# Altium PCB 05-01891R2.1T_接收+NRF2401.PcbDoc
Units mm, origin at the board's own origin, x right, y up, seen from the top; angles counter-clockwise.
Board outline 23.4 x 50 mm, 2 copper layers (Top Layer, Bottom Layer); 20 components, 25 nets, 86 pads, 32 vias.
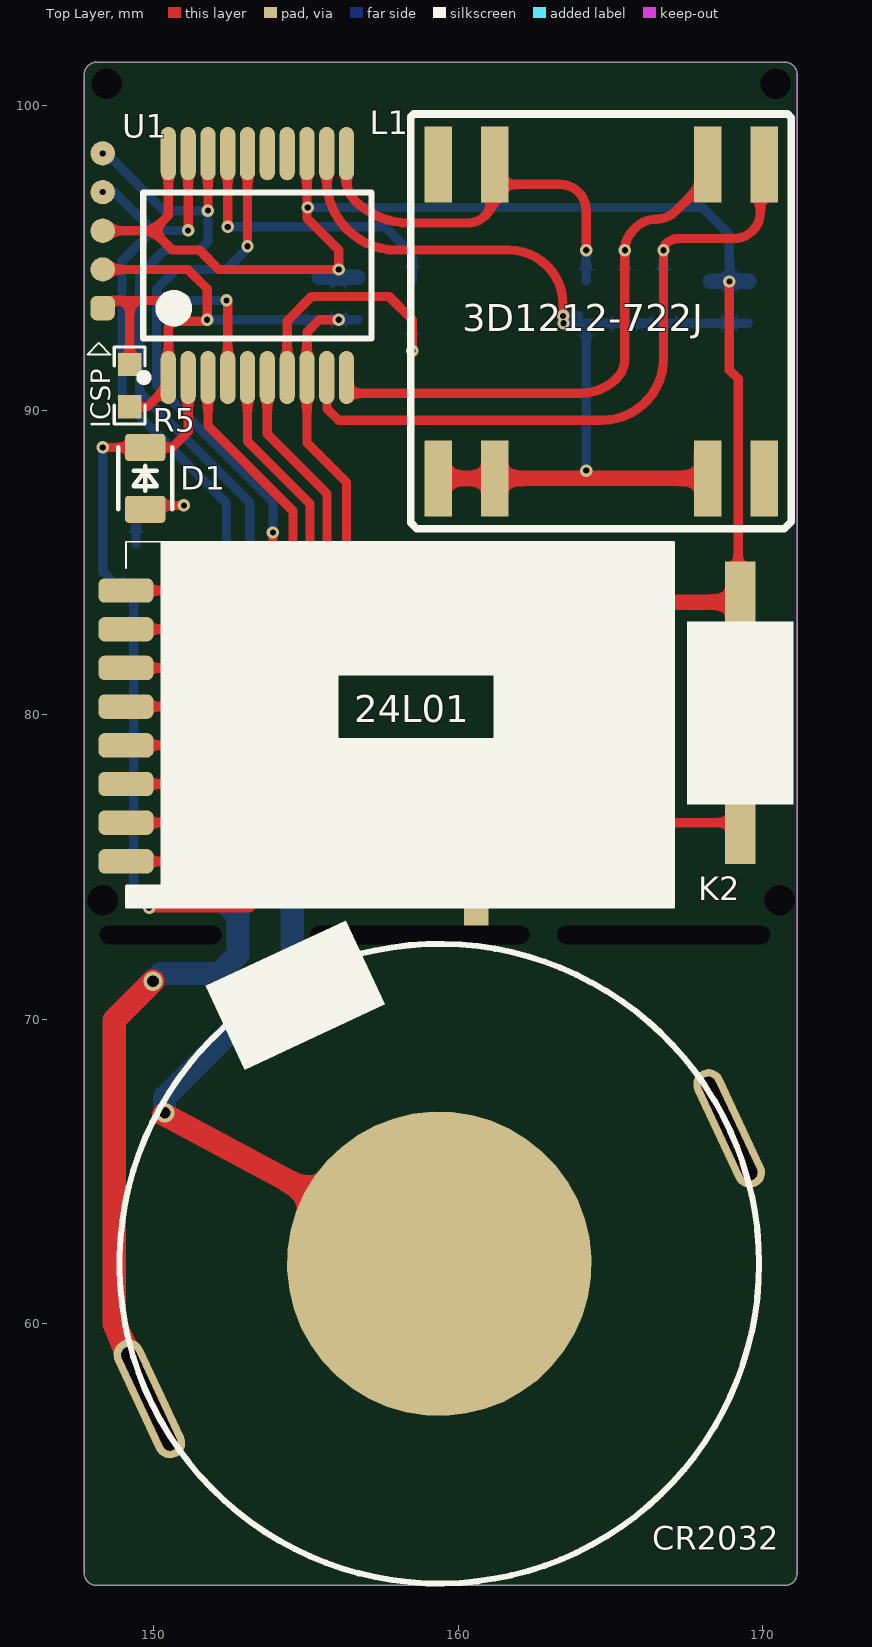
[diagram p0: Top Layer view]
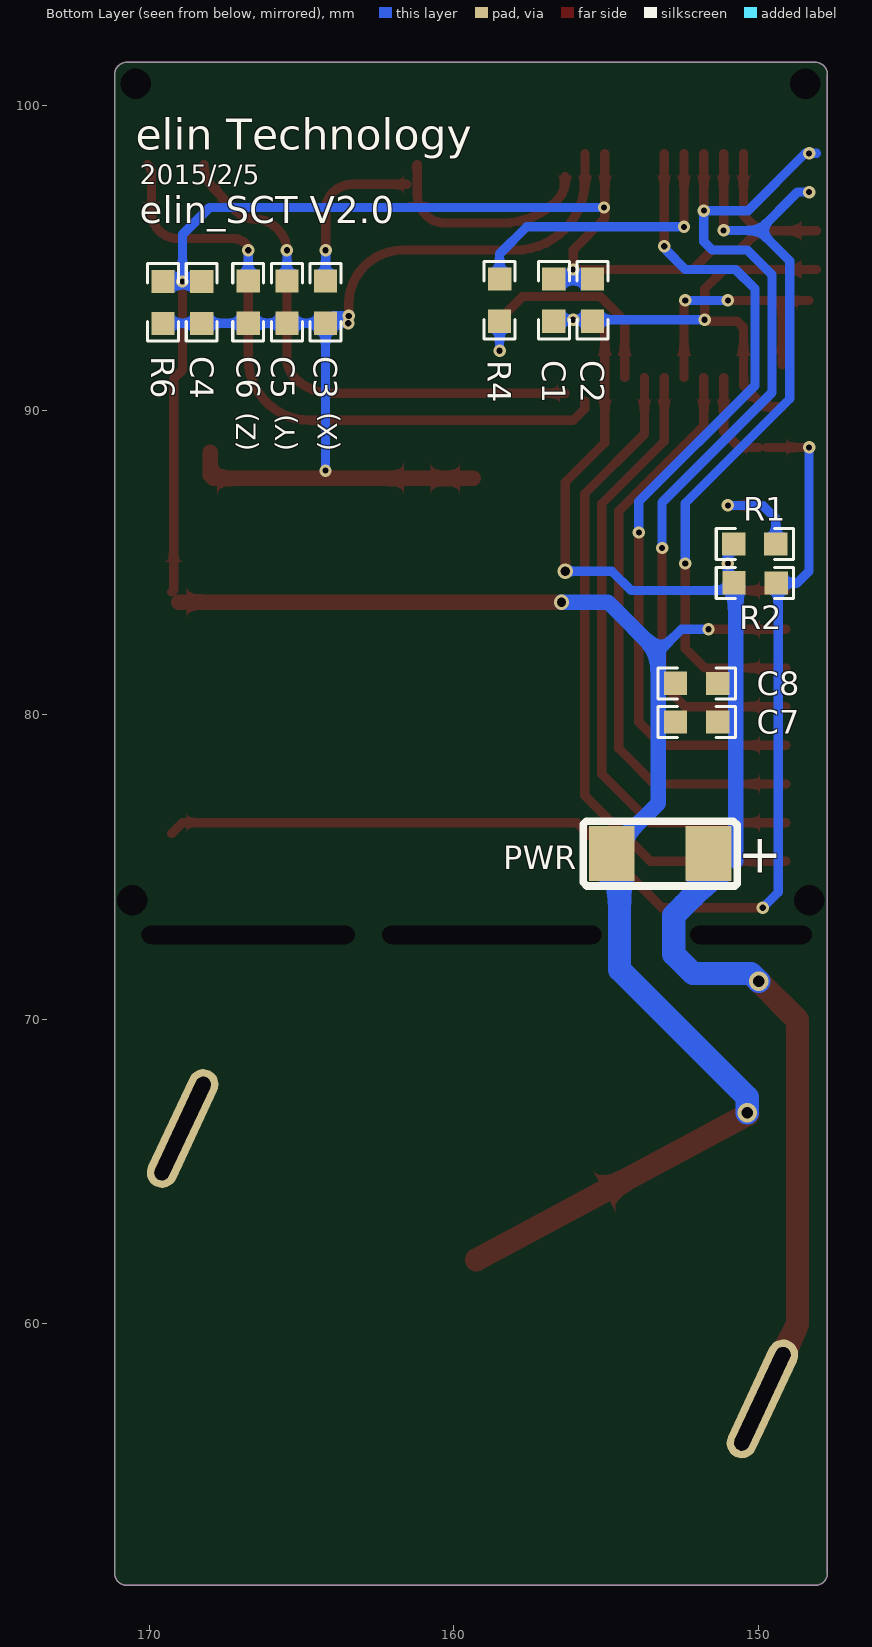
[diagram p1: Bottom Layer view, seen from below]

## Layer stack, top to bottom
Top Solder: solder mask 0.0102, Solder Resist, Dk 3.5
Top Layer: signal copper 0.0356
Dielectric 1: dielectric 0.32, FR-4, Dk 4.8
Bottom Layer: signal copper 0.0356
Bottom Solder: solder mask 0.0102, Solder Resist, Dk 3.5

## Board outline
147.733,51.814 ccw(c148.133,51.814) 148.133,51.414 170.733,51.414 ccw(c170.733,51.814) 171.133,51.814 171.133,101.014 ccw(c170.733,101.014) 170.733,101.414 148.133,101.414 ccw(c148.133,101.014) 147.733,101.014

## Design rules (kind name [scope] priority, off if disabled: settings)
Clearance [All] p1: gap=0.254
PolygonConnect [All] p1: connectstyle=Relief reliefconductorwidth=0.254 reliefentries=4 polygonreliefangle="90 Angle" airgapwidth=0.254
RoutingVias [All] p1: holewidth=0.254 width=0.457 viastyle="Through Hole" minholewidth=0.203 minwidth=0.254 maxholewidth=0.711 maxwidth=1.27
SilkToSilkClearance [All] p1: silktosilkclearance=0
SilkToSolderMaskClearance [IsPad] p1: minsilkscreentomaskgap=0 clearancetoexposedcopper=TRUE
SolderMaskExpansion [All] p1: expansion=0.102
Width [All] p1: maxlimit=1.27 minlimit=0.254 preferedwidth=0.305 minimp=50.000000 maximp=50.000000 favimp=50.000000
28 further rules are at their usual default settings.

## Classes and differential pairs
component class PKE_T: C1 C2 C3 C4 C5 C6 CR2032 D1 K2 R1 R4 R6 U1

## Components (designator, comment, footprint, x,y, rotation, side; value= is the part's Value field where it differs from the comment)
C1 "1uF" 0603P 156.718,93.599 r90 bottom
C2 "100nF" 0603P 155.448,93.599 r90 bottom
C3 "143pF" 0603P 164.209,93.535 r90 bottom
C4 "1uF" 0603P 168.273,93.535 r270 bottom
C5 "143pF" 0603P 165.479,93.535 r90 bottom
C6 "143pF" 0603P 166.749,93.535 r90 bottom
C7 "10uF" 0603P 152.019,79.756 r0 bottom (schematic designator C1)
C8 "10uF" 0603P 152.019,81.026 r0 bottom (schematic designator C1)
CR2032 "BATT" CR2032_Shell 159.385,61.976 r25 top locked (schematic designator BAT1)
D1 "LED-G" 0805-LED 149.733,87.757 r90 top locked
K2 "KEY_M" KEY_3*6*2.5mm 167.513,83.058 r270 top locked
L1 "Comment" "SMD 3D_ANT" 170.053,87.757 r180 top locked
PWR "Comment" PWR 151.638,75.438 r0 bottom
R1 "1K" 0603P 150.114,85.598 r0 bottom
R2 "10K" 0603P 150.114,84.328 r180 bottom
R4 "0R" 0603P 158.496,93.599 r90 bottom
R5 "10k" 0603P 149.225,90.805 r270 top (schematic designator R4)
R6 "10M" 0603P 169.543,93.535 r270 bottom
U1 "PIC16F639" SSOP-5.3mm-20 153.416,94.742 r90 top locked
? "Comment" TaiChan24L01 149.098,84.074 r270 top locked

## Footprints (in the part's own frame and the unit in brackets; to place one, negate y for a bottom-side part, rotate by r counter-clockwise, add the part's x,y. Pads: shape width x height; smd on the part's side, far side on the other; paste and mask are expansions set on the pad)
0603P [mil]
  rect 30x30 smd: 1(-27,0) 2(27.5,-0.06)
  silkscreen extent -50,-20 50,20
0805-LED [mil]
  rrect25% 35x52 smd: 1(-40,0) 2(40,0)
  silkscreen extent -40,-35 40,35, body extent -40,-25 40,24, height 43
CR2032_Shell [mm]
  oval 1x4.2 hole 0.5 slot 3.7 at 90 deg: 1(-10.5,0) 1(10.5,0)
  round 10 smd: 2(0,0)
  silkscreen extent -10.5,-10.5 10.5,10.5
KEY_3*6*2.5mm [mm]
  rect 2x1 smd: 1(-0.965,1.75) 2(6.96,1.75)
  silkscreen extent 0,0 6,3.5
PWR [mm]
  rect 1.5x1.8 smd: 1(0,0) 2(3.175,0)
  silkscreen extent -0.94,-1.07 4.11,1.07
"SMD 3D_ANT" [mm]
  round 0.9 on Top Overlay: 0(-1.626,0.864)
  rect 0.9x2.5 smd: 1(0,0) 2(1.85,0) 3(8.85,0) 4(10.7,0) 5(10.7,-10.3) 6(8.85,-10.3) 7(1.85,-10.3) 8(0,-10.3)
  silkscreen extent -0.89,-11.96 11.61,1.65
SSOP-5.3mm-20 [mm] "SSOP, 20-Leads, Body 7.20x5.30mm, Pitch 0.65mm, IPC Medium Density"
  oval 1.75x0.5 smd: 1(-3.675,2.925) 2(-3.675,2.275) 3(-3.675,1.625) 4(-3.675,0.975) 5(-3.675,0.325) 6(-3.675,-0.325) 7(-3.675,-0.975) 8(-3.675,-1.625) 9(-3.675,-2.275) 10(-3.675,-2.925) 11(3.675,-2.925) 12(3.675,-2.275) 13(3.675,-1.625) 14(3.675,-0.975) 15(3.675,-0.325) 16(3.675,0.325) 17(3.675,0.975) 18(3.675,1.625) 19(3.675,2.275) 20(3.675,2.925)
  silkscreen extent -3.8,-3.75 2.4,3.85, body extent -2.8,-3.75 2.8,3.75, height 2
TaiChan24L01 [mm]
  rrect50% 1.8x0.8 smd: 0(10.4,11.506)
  rrect50% 0.8x1.8 smd: 1(0,0) 2(1.27,0) 3(2.54,0) 4(3.81,0) 5(5.08,0) 6(6.35,0) 7(7.62,0) 8(8.89,0)
  silkscreen extent -1.6,0 10.4,18

## Part data
C1 C2 C3 C4 C5 C6 C7 C8: library part C
CR2032: library part BAT
D1: library part LED-GRE, "绿色LED"
R1 R2 R4 R5 R6: library part Res
U1: "+AFE"

## Free pads (board coordinates)
  round 0 hole 1: 0(148.336,73.914) 0(148.463,100.711) 0(170.434,100.711) 0(170.561,73.914)
  rrect50% 0.8x0.8 smd: 0(148.336,93.345)
  round 0.8 smd: 0(148.336,94.615) 0(148.336,95.885) 0(148.336,97.155) 0(148.336,98.425)
  round 0 hole 0.6 slot 4 at 0 deg: 0(150.241,72.771)
  round 0 hole 0.6 slot 7.2 at 0 deg: 0(158.75,72.771)
  round 0 hole 0.6 slot 7 at 0 deg: 0(166.751,72.771)
  round 1 on Top Overlay: 0(170.053,90.297)

## Via types
v1: diameter 0.406, hole 0.203, Top Layer to Bottom Layer, 28 vias
v2: diameter 0.508, hole 0.305, Top Layer to Bottom Layer, 2 vias
v3: diameter 0.635, hole 0.381, Top Layer to Bottom Layer, 2 vias

## Nets (pads, with @x,y where several pads share a name; then routed paths per layer and width w, separated by ;. In a path a pad name is that pad's centre, name@x,y a point inside that pad or via, vN(x,y) a via of type N, cw(c..) or ccw(c..) an arc to the next point about the centre after c; other vN are vias at no path point)
GND: ?.2 C1.2 C2.2 C4.1 C7.2 C8.2 CR2032.2 K2.1 pad.0@148.336,95.885 PWR.2 R6.1 U1.13 U1.20 | length 92.4
  Top Layer w0.305: pad.0@148.095,95.885 149.987,95.885 ; ?.2 v1(151.638,82.804) ; U1.20 150.491,96.389 149.987,95.885 ; U1.13 155.041,96.292 156.083,95.25 v1(156.083,94.615) 152.146,94.615 151.511,95.25 150.622,95.25 149.987,95.885 ; v1(168.908,94.221) 168.908,91.311 169.197,91.023 169.197,84.09 K2.1
  Top Layer w0.508: v2(156.464,83.693) K2.1@169.037,83.693
  Top Layer w0.762: v3@150.34,66.876 CR2032.2@159.258,62.103
  Bottom Layer w0.305: v1(151.638,82.804) 152.527,82.804 153.289,82.042 ; v1(155.067,96.647) 168.021,96.647 168.908,95.76 v1(168.908,94.221)
  Bottom Layer w0.508: PWR.2@154.623,75.755 153.289,77.089 153.289,82.042 154.94,83.693 v2(156.464,83.693) ; C2.2@155.446,94.361 C1.2@156.716,94.361 ; C4.1 R6.1
  Bottom Layer w0.762: v3(150.368,66.929) 150.368,67.437 154.559,71.628 154.559,75.184 PWR.2
LCCOM: C3.1 C4.2 C5.1 C6.1 L1.2 L1.3 L1.4 R6.2 U1.12 | length 32.4
  Top Layer w0.305: U1.12 155.691,97.547 ccw(c157.988,97.547) 157.988,95.25 161.671,95.25 cw(c161.671,93.472) 163.449,93.472 v1@163.449,92.85
  Top Layer w0.508: L1.4 L1.3 167.894,87.757 167.989,87.852 L1.2@167.989,88.614
  Bottom Layer w0.305: v1(163.449,93.091) C3.1@163.968,93.091 ; v1(163.462,92.85) C3.1 ; v1@164.209,88.011 C3.1 ; R6.2@169.532,92.85 C6.1 C5.1 C3.1
  other v1: 164.211,88.011
LCX: C3.2 L1.6 U1.11 | length 12.7
  Top Layer w0.305: U1.11@156.35,97.661 ccw(c157.256,97.53) 156.609,96.883 ccw(c158.405,98.679) 158.405,96.139 160.296,96.139 ccw(c160.296,97.006) 160.909,96.393 ccw(c160.199,97.103) 161.203,97.103 L1.6 ccw(c161.331,98.057) L1.6@161.24,97.967 ; L1.6@161.544,97.409 162.179,97.409 163.344,97.409 cw(c163.344,96.542) 163.957,97.155 cw(c163.352,96.55) 164.208,96.55 v1(164.208,95.247)
  Bottom Layer w0.305: C3.2 v1(164.208,95.247)
LCY: C5.2 L1.7 U1.10 | length 18.5
  Top Layer w0.305: U1.10@156.349,90.551 164.027,90.551 ccw(c164.027,92.222) 165.208,91.04 ccw(c164.558,91.691) 165.478,91.691 v1(165.478,95.247) cw(c166.398,95.247) 165.747,95.897 165.847,95.997 cw(c166.497,95.346) 166.497,96.266 166.519,96.266 ccw(c166.519,97.133) 167.132,96.52 167.874,97.262 ccw(c167.078,98.057) L1.7
  Bottom Layer w0.305: C5.2 v1(165.478,95.247)
LCZ: C6.2 L1.8 U1.9 | length 22.6
  Top Layer w0.305: U1.9@155.702,90.297 155.702,90.043 156.083,89.662 164.719,89.662 ccw(c164.719,91.691) 166.748,91.691 v1(166.748,95.247) cw(c167.054,95.247) 166.838,95.464 cw(c167.242,95.059) 167.242,95.631 169.059,95.631 ccw(c169.059,96.498) 169.672,95.885 ccw(c169.059,96.498) 169.926,96.498 169.926,97.75 cw(c170.36,97.75) L1.8
  Bottom Layer w0.305: C6.2 v1(166.748,95.247)
LFDATA: R4.1 U1.7 | length 8.5
  Top Layer w0.305: U1.7 154.391,92.923 155.194,93.726 157.734,93.726 158.496,92.964 v1(158.496,91.948)
  Bottom Layer w0.305: v1(158.496,91.948) R4.1@158.496,92.85
NetBAT1_1: 
NetC1_1: 
NetC6_2: 
NetC7_1: 
NetC7_2: 
NetD1_1: D1.1 R1.1 | length 3.7
  Top Layer w0.305: D1.1@149.86,86.868 v1(151.003,86.868)
  Bottom Layer w0.305: R1.1 149.428,86.436 149.86,86.868 v1(151.003,86.868)
NetQ1_1: 
NetQ1_2: 
NetQ1_3: 
RA0/ICSPDAT: ?.3 pad.0@148.336,97.155 U1.19 | length 25
  Top Layer w0.305: ?.3 151.765,81.534 152.4,82.169 v1(152.4,84.963) ; v1(151.141,95.896) U1.19
  Bottom Layer w0.305: v1(148.336,97.155) 148.716,97.156 149.976,95.896 ; v1(151.141,95.896) 149.976,95.896 ; v1(152.4,84.963) 152.4,86.938 148.971,90.367 148.971,94.891 149.976,95.896
RA1/ICSPCLK: ?.4 pad.0@148.336,98.425 U1.18 | length 29.7
  Top Layer w0.305: ?.4 152.4,80.264 153.162,81.026 v1(153.162,85.471) ; v1(151.791,96.546) U1.18
  Bottom Layer w0.305: v1(153.162,85.471) 153.162,86.967 149.555,90.574 149.555,94.437 150.368,95.25 151.511,95.25 151.791,95.53 v1(151.791,96.546) 150.342,96.546 v1@148.463,98.425 ; v1@148.463,98.425 148.095,98.425 v1@148.463,98.425
  other v1: 148.336,98.425
RA2: R4.2 U1.17 | length 9.7
  Top Layer w0.305: v1(152.441,96.012) U1.17
  Bottom Layer w0.305: v1(152.441,96.012) 157.607,96.012 158.496,95.123 R4.2@158.496,94.234
RA3/MCLR: pad.0@148.336,93.345 R5.1 U1.4 | length 8.7
  Top Layer w0.305: pad.0@148.349,93.599 149.225,93.599 ; R5.1 149.225,93.599 ; v1(151.003,93.599) 149.225,93.599 ; U1.4 v1@152.441,93.599
  Bottom Layer w0.305: v1(151.003,93.599) v1(152.4,93.599)
RA4: ?.6 U1.3 | length 19.3
  Top Layer w0.305: ?.6 153.416,77.724 154.584,78.892 154.584,86.687 151.791,89.481 U1.3
RA5: D1.2 K2.2 R2.2 U1.2 | length 41.5
  Top Layer w0.305: v1(148.336,88.773) D1.2 ; v1(149.86,73.66) 153.162,73.66 155.956,76.454 168.907,76.454 K2.2 ; D1.2@149.987,88.773 150.622,88.773 151.141,89.292 U1.2
  Bottom Layer w0.305: v1(148.336,88.773) 148.336,84.709 148.719,84.326 R2.2 149.352,84.263 149.352,74.168 v1(149.86,73.66)
RC0: ?.5 U1.16 | length 27.4
  Top Layer w0.305: ?.5 153.162,78.994 153.924,79.756 v1(153.924,85.979) ; v1(153.091,95.377) U1.16
  Bottom Layer w0.305: v1@153.035,95.25 152.4,94.615 150.749,94.615 150.114,93.98 150.114,90.805 153.924,86.995 v1(153.924,85.979)
RC4: ?.8 U1.6 | length 22
  Top Layer w0.305: ?.8 153.543,75.184 155.702,77.343 155.702,87.249 153.741,89.21 U1.6
RC5: ?.7 U1.5 | length 20.6
  Top Layer w0.305: ?.7 153.543,76.454 155.143,78.054 155.143,86.919 153.091,88.971 U1.5
VCC: ?.1 C1.1 C2.1 C7.1 C8.1 CR2032.1@149.869,57.539 pad.0@148.336,94.615 PWR.1 R1.2 R2.1 R5.2 U1.1 U1.8 | length 64
  Top Layer w0.305: pad.0@148.095,94.615 151.13,94.615 151.765,93.98 v1(151.765,92.964) 151.714,92.913 150.698,92.913 150.491,92.706 U1.1 ; ?.1 150.622,84.074 151.003,84.455 v1(151.003,84.963) ; R5.2 149.796,90.106 150.485,90.795 U1.1@150.485,91.067 ; v1(156.083,92.964) 155.448,92.964 155.041,92.557 U1.8 155.041,88.926 156.337,87.63 v2(156.337,84.709)
  Top Layer w0.762: CR2032.1@149.742,57.666 148.717,60 148.717,69.977 v3(149.987,71.247)
  Bottom Layer w0.305: R2.1 151.054,84.074 154.178,84.074 154.813,84.709 v2(156.337,84.709) ; R2.1@151.003,84.531 v1(151.003,84.963) R1.2@151.003,85.409 ; v1(151.765,92.964) C1.1@156.718,92.964
  Bottom Layer w0.508: R2.1@150.673,84.201 150.749,84.125 150.749,75.184
  Bottom Layer w0.762: v3(149.987,71.247) 150.241,71.501 152.146,71.501 152.781,72.136 152.781,73.406 151.638,74.549 PWR.1
pads on no net: ?.0 CR2032.1@168.901,66.413 L1.0 L1.1 L1.5 U1.14 U1.15

## Polygon pours and split planes (outlines as drawn)
no net on Top Overlay "Top Overlay-No Net" (solid): 150.241,85.674 167.098,85.674 167.098,73.674 150.241,73.674

## Keep-outs
Keep-Out Layer:
  lines w0.013: 170.733,51.406 170.741,51.414 148.133,51.414 cw(c148.133,51.814) 147.733,51.814 147.733,101.014 cw(c148.133,101.014) 148.133,101.414 170.733,101.414 cw(c170.733,101.014) 171.133,101.014 171.133,51.814 cw(c170.733,51.814) 170.733,51.414

## Silkscreen, mask and mechanical layers (free items; w line width, h text height)
Top Overlay:
  rectangle: 149.098,73.674 150.876,74.422
  region: 153.003,68.338 157.607,70.485 156.319,73.247 151.715,71.101
  pour cut-out: 156.083,81.28 161.163,81.28 161.163,79.248 157.734,79.248 156.083,79.248 156.083,80.264
  lines w0.06: 147.828,91.821 148.59,91.821 148.209,92.202 147.828,91.821
  text "3D1212-722J" at 160.147,92.583 h0.89
  text "ICSP" at 148.59,89.408 h0.64 r90
  text "24L01" at 156.591,79.756 h0.89
Bottom Overlay:
  text "elin Technology" at 170.434,98.552 h1.02
  text "2015/2/5" at 170.307,97.409 h0.64
  text "elin_SCT V2.0" at 170.307,96.139 h0.89
  text "(X)" at 163.83,88.646 h0.64 r270
  text "(Y)" at 165.227,88.646 h0.64 r270
  text "(Z)" at 166.497,88.646 h0.64 r270
  text "+" at 149.225,74.803 h1.27